# EAGLE board omnetics-adapter-64_panel (EAGLE 8.3.2), part 1 of 3
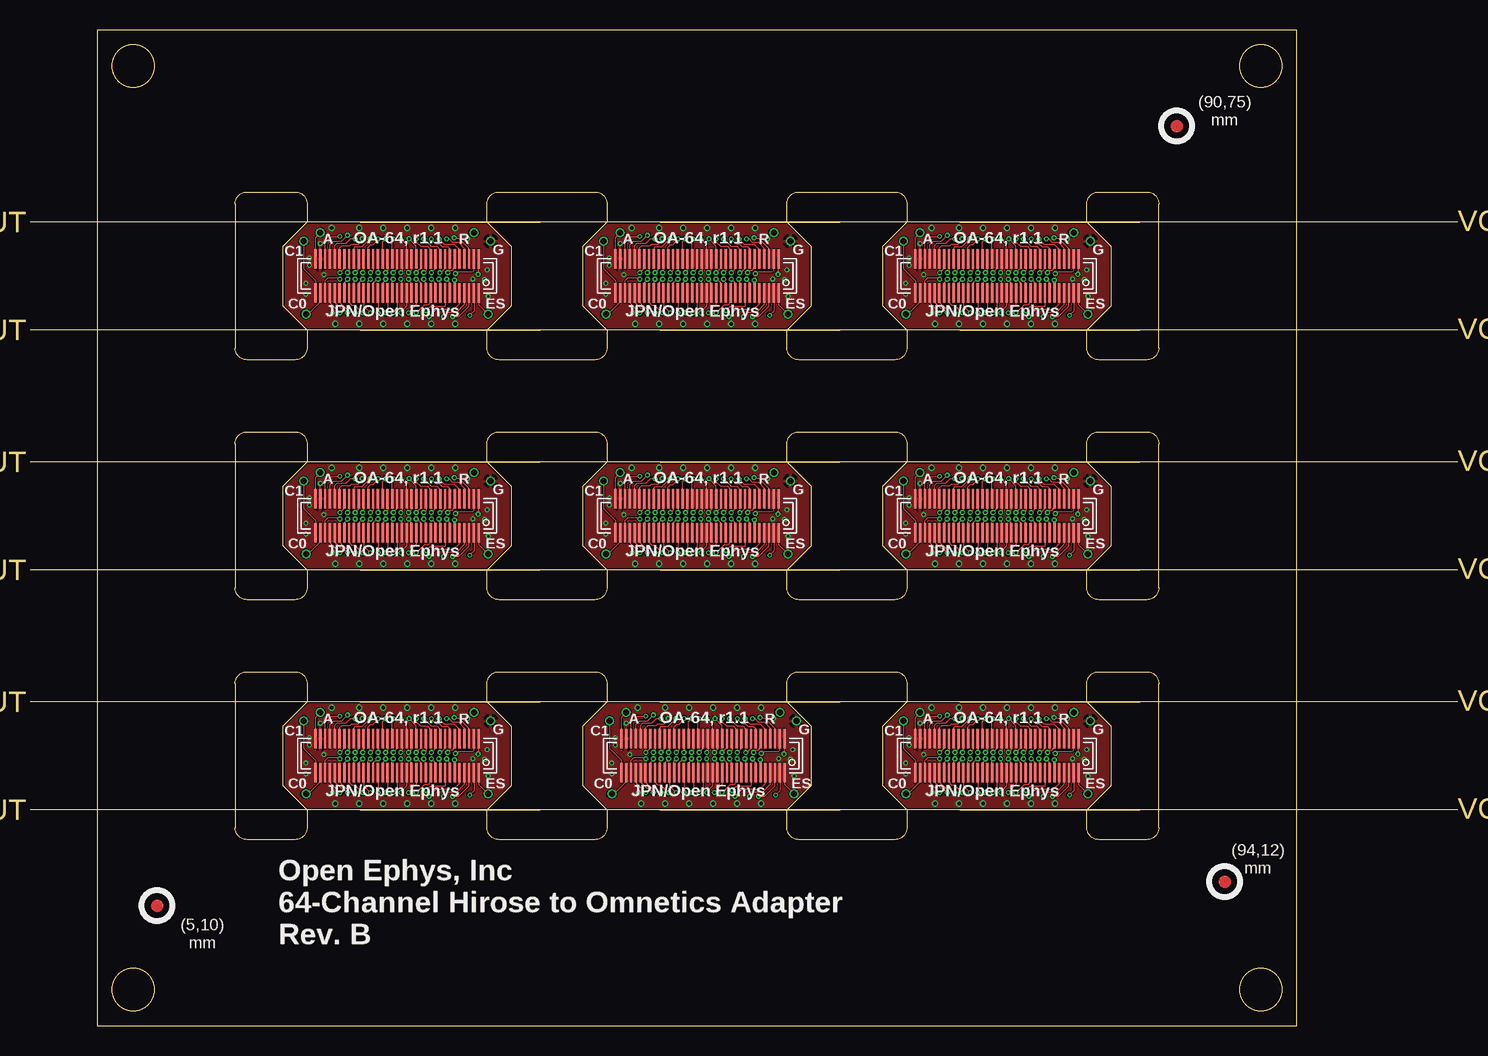
[diagram p0: board, top side]
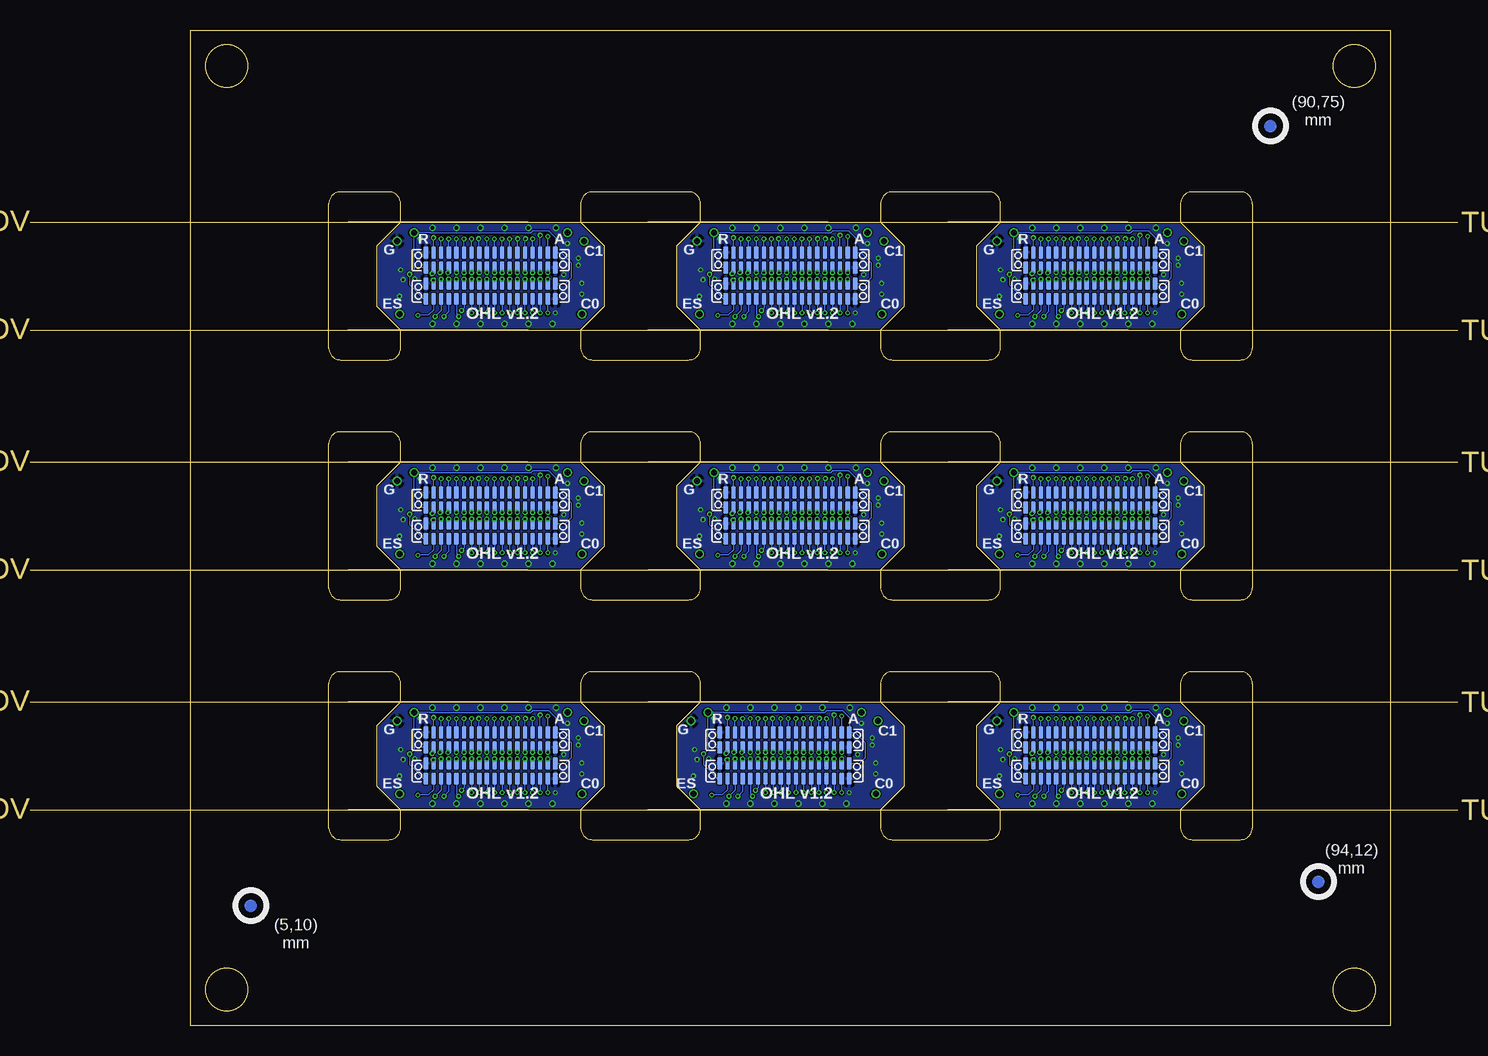
[diagram p1: board, bottom side, seen from below]

Size 119 x 83 mm. Coordinates in mm from the lower left corner, seen from the top.
Outline: 220 segments
Outline: circle at 8.6,80 radius 1.75
Outline: circle at 102.6,80 radius 1.75
Outline: circle at 102.6,3 radius 1.75
Outline: circle at 8.6,3 radius 1.75
Copper layers (1*16): Top 0.035mm / dielectric 0.2mm / Bottom 0.035mm
Design rules "jlcpcb-2-layer": minimum track width 3.5mil, minimum drill 0.2mm, track to track 3.5mil, track to pad 5mil, pad to pad 5mil, via to via 5mil, smd to smd 0mil, copper to edge 0.1mm, drill to drill 5mil, minimum pad ring 4mil, minimum via ring 4mil, stop-mask expansion 3mil, vias tented up to drill 100mil, thermal gap 10mil

## Footprints (pad centres in the part's own frame; a part is rotated, then mirrored left to right if it is on the bottom)
GOLDPIN_0.5ID_0.7OD = drill 0.5 pad 0.7: P$1 0,0
DDF40-70REC-LRG = smd 0.2 x 1.64: 1 -6.8,1.42; 2 -6.4,1.42; 3 -6,1.42; 4 -5.6,1.42; 5 -5.2,1.42; 6 -4.8,1.42; 7 -4.4,1.42; 8 -4,1.42; 9 -3.6,1.42; 10 -3.2,1.42; 11 -2.8,1.42; 12 -2.4,1.42; 13 -2,1.42; 14 -1.6,1.42; 15 -1.2,1.42; 16 -0.8,1.42; 17 -0.4,1.42; 18 0,1.42; 19 0.4,1.42; 20 0.8,1.42; 21 1.2,1.42; 22 1.6,1.42; 23 2,1.42; 24 2.4,1.42; 25 2.8,1.42; 26 3.2,1.42; 27 3.6,1.42; 28 4,1.42; 29 4.4,1.42; 30 4.8,1.42; 31 5.2,1.42; 32 5.6,1.42; 33 6,1.42; 34 6.4,1.42; 35 6.8,1.42; 36 6.8,-1.42; 37 6.4,-1.42; 38 6,-1.42; 39 5.6,-1.42; 40 5.2,-1.42; 41 4.8,-1.42; 42 4.4,-1.42; 43 4,-1.42; 44 3.6,-1.42; 45 3.2,-1.42; 46 2.8,-1.42; 47 2.4,-1.42; 48 2,-1.42; 49 1.6,-1.42; 50 1.2,-1.42; 51 0.8,-1.42; 52 0.4,-1.42; 53 0,-1.42; 54 -0.4,-1.42; 55 -0.8,-1.42; 56 -1.2,-1.42; 57 -1.6,-1.42; 58 -2,-1.42; 59 -2.4,-1.42; 60 -2.8,-1.42; 61 -3.2,-1.42; 62 -3.6,-1.42; 63 -4,-1.42; 64 -4.4,-1.42; 65 -4.8,-1.42; 66 -5.2,-1.42; 67 -5.6,-1.42; 68 -6,-1.42; 69 -6.4,-1.42; 70 -6.8,-1.42
NPD-36-VV-GS = smd 0.381 x 1.016: 1 0,0; 2 0.635,0; 3 1.27,0; 4 1.905,0; 5 2.54,0; 6 3.175,0; 7 3.81,0; 8 4.445,0; 9 5.08,0; 10 5.715,0; 11 6.35,0; 12 6.985,0; 13 7.62,0; 14 8.255,0; 15 8.89,0; 16 9.525,0; 17 10.16,0; 18 10.795,0; 19 10.795,1.27; 20 10.16,1.27; 21 9.525,1.27; 22 8.89,1.27; 23 8.255,1.27; 24 7.62,1.27; 25 6.985,1.27; 26 6.35,1.27; 27 5.715,1.27; 28 5.08,1.27; 29 4.445,1.27; 30 3.81,1.27; 31 3.175,1.27; 32 2.54,1.27; 33 1.905,1.27; 34 1.27,1.27; 35 0.635,1.27; 36 0,1.27

## Placement (x,y rotation side)
AN  LRG_GP  [GOLDPIN_0.5ID_0.7OD]  24.2,26.1 0 top
AN1  LRG_GP  [GOLDPIN_0.5ID_0.7OD]  49.7,26.1 0 top
AN2  LRG_GP  [GOLDPIN_0.5ID_0.7OD]  74.2,26.1 0 top
AN3  LRG_GP  [GOLDPIN_0.5ID_0.7OD]  24.2,46.1 0 top
AN4  LRG_GP  [GOLDPIN_0.5ID_0.7OD]  49.2,46.1 0 top
AN5  LRG_GP  [GOLDPIN_0.5ID_0.7OD]  74.2,46.1 0 top
AN6  LRG_GP  [GOLDPIN_0.5ID_0.7OD]  74.2,66.1 0 top
AN7  LRG_GP  [GOLDPIN_0.5ID_0.7OD]  49.2,66.1 0 top
AN8  LRG_GP  [GOLDPIN_0.5ID_0.7OD]  24.2,66.1 0 top
CAT0  LRG_GP  [GOLDPIN_0.5ID_0.7OD]  23,19.3 0 top
CAT1  LRG_GP  [GOLDPIN_0.5ID_0.7OD]  22.8,25.4 0 top
CAT2  LRG_GP  [GOLDPIN_0.5ID_0.7OD]  48.5,19.3 0 top
CAT3  LRG_GP  [GOLDPIN_0.5ID_0.7OD]  48.3,25.4 0 top
CAT4  LRG_GP  [GOLDPIN_0.5ID_0.7OD]  73,19.3 0 top
CAT5  LRG_GP  [GOLDPIN_0.5ID_0.7OD]  72.8,25.4 0 top
CAT6  LRG_GP  [GOLDPIN_0.5ID_0.7OD]  23,39.3 0 top
CAT7  LRG_GP  [GOLDPIN_0.5ID_0.7OD]  22.8,45.4 0 top
CAT8  LRG_GP  [GOLDPIN_0.5ID_0.7OD]  48,39.3 0 top
CAT9  LRG_GP  [GOLDPIN_0.5ID_0.7OD]  47.8,45.4 0 top
CAT10  LRG_GP  [GOLDPIN_0.5ID_0.7OD]  73,39.3 0 top
CAT11  LRG_GP  [GOLDPIN_0.5ID_0.7OD]  72.8,45.4 0 top
CAT12  LRG_GP  [GOLDPIN_0.5ID_0.7OD]  73,59.3 0 top
CAT13  LRG_GP  [GOLDPIN_0.5ID_0.7OD]  72.8,65.4 0 top
CAT14  LRG_GP  [GOLDPIN_0.5ID_0.7OD]  48,59.3 0 top
CAT15  LRG_GP  [GOLDPIN_0.5ID_0.7OD]  47.8,65.4 0 top
CAT16  LRG_GP  [GOLDPIN_0.5ID_0.7OD]  23,59.3 0 top
CAT17  LRG_GP  [GOLDPIN_0.5ID_0.7OD]  22.8,65.4 0 top
E$1  [FIDUCIAL]  10.6,10 0 top
E$2  [FIDUCIAL]  99.6,12 0 top
E$3  [FIDUCIAL]  95.6,75 0 top
E$4  [FIDUCIAL]  100.6,10 0 bottom
E$5  [FIDUCIAL]  11.6,12 0 bottom
E$6  [FIDUCIAL]  15.6,75 0 bottom
ESTIM  LRG_GP  [GOLDPIN_0.5ID_0.7OD]  38.2,19.3 0 top
ESTIM1  LRG_GP  [GOLDPIN_0.5ID_0.7OD]  37,26.1 0 top
ESTIM2  LRG_GP  [GOLDPIN_0.5ID_0.7OD]  38.4,25.4 0 top
ESTIM3  LRG_GP  [GOLDPIN_0.5ID_0.7OD]  63.7,19.3 0 top
ESTIM4  LRG_GP  [GOLDPIN_0.5ID_0.7OD]  62.5,26.1 0 top
ESTIM5  LRG_GP  [GOLDPIN_0.5ID_0.7OD]  63.9,25.4 0 top
ESTIM6  LRG_GP  [GOLDPIN_0.5ID_0.7OD]  88.2,19.3 0 top
ESTIM7  LRG_GP  [GOLDPIN_0.5ID_0.7OD]  87,26.1 0 top
ESTIM8  LRG_GP  [GOLDPIN_0.5ID_0.7OD]  88.4,25.4 0 top
ESTIM9  LRG_GP  [GOLDPIN_0.5ID_0.7OD]  38.2,39.3 0 top
ESTIM10  LRG_GP  [GOLDPIN_0.5ID_0.7OD]  37,46.1 0 top
ESTIM11  LRG_GP  [GOLDPIN_0.5ID_0.7OD]  38.4,45.4 0 top
ESTIM12  LRG_GP  [GOLDPIN_0.5ID_0.7OD]  63.2,39.3 0 top
ESTIM13  LRG_GP  [GOLDPIN_0.5ID_0.7OD]  62,46.1 0 top
ESTIM14  LRG_GP  [GOLDPIN_0.5ID_0.7OD]  63.4,45.4 0 top
ESTIM15  LRG_GP  [GOLDPIN_0.5ID_0.7OD]  88.2,39.3 0 top
ESTIM16  LRG_GP  [GOLDPIN_0.5ID_0.7OD]  87,46.1 0 top
ESTIM17  LRG_GP  [GOLDPIN_0.5ID_0.7OD]  88.4,45.4 0 top
ESTIM18  LRG_GP  [GOLDPIN_0.5ID_0.7OD]  88.2,59.3 0 top
ESTIM19  LRG_GP  [GOLDPIN_0.5ID_0.7OD]  87,66.1 0 top
ESTIM20  LRG_GP  [GOLDPIN_0.5ID_0.7OD]  88.4,65.4 0 top
ESTIM21  LRG_GP  [GOLDPIN_0.5ID_0.7OD]  63.2,59.3 0 top
ESTIM22  LRG_GP  [GOLDPIN_0.5ID_0.7OD]  62,66.1 0 top
ESTIM23  LRG_GP  [GOLDPIN_0.5ID_0.7OD]  63.4,65.4 0 top
ESTIM24  LRG_GP  [GOLDPIN_0.5ID_0.7OD]  38.2,59.3 0 top
ESTIM25  LRG_GP  [GOLDPIN_0.5ID_0.7OD]  37,66.1 0 top
ESTIM26  LRG_GP  [GOLDPIN_0.5ID_0.7OD]  38.4,65.4 0 top
J1  DF40-REC  [DDF40-70REC-LRG]  30.6,22.5 180 top
J2  [NPD-36-VV-GS]  25.2,24.45 180 bottom
J3  [NPD-36-VV-GS]  25.2,21.85 180 bottom
J4  DF40-REC  [DDF40-70REC-LRG]  56.1,22.5 180 top
J5  [NPD-36-VV-GS]  50.7,24.45 180 bottom
J6  [NPD-36-VV-GS]  50.7,21.85 180 bottom
J7  DF40-REC  [DDF40-70REC-LRG]  80.6,22.5 180 top
J8  [NPD-36-VV-GS]  75.2,24.45 180 bottom
J9  [NPD-36-VV-GS]  75.2,21.85 180 bottom
J10  DF40-REC  [DDF40-70REC-LRG]  30.6,42.5 180 top
J11  [NPD-36-VV-GS]  25.2,44.45 180 bottom
J12  [NPD-36-VV-GS]  25.2,41.85 180 bottom
J13  DF40-REC  [DDF40-70REC-LRG]  55.6,42.5 180 top
J14  [NPD-36-VV-GS]  50.2,44.45 180 bottom
J15  [NPD-36-VV-GS]  50.2,41.85 180 bottom
J16  DF40-REC  [DDF40-70REC-LRG]  80.6,42.5 180 top
J17  [NPD-36-VV-GS]  75.2,44.45 180 bottom
J18  [NPD-36-VV-GS]  75.2,41.85 180 bottom
J19  DF40-REC  [DDF40-70REC-LRG]  80.6,62.5 180 top
J20  [NPD-36-VV-GS]  75.2,64.45 180 bottom
J21  [NPD-36-VV-GS]  75.2,61.85 180 bottom
J22  DF40-REC  [DDF40-70REC-LRG]  55.6,62.5 180 top
J23  [NPD-36-VV-GS]  50.2,64.45 180 bottom
J24  [NPD-36-VV-GS]  50.2,61.85 180 bottom
J25  DF40-REC  [DDF40-70REC-LRG]  30.6,62.5 180 top
J26  [NPD-36-VV-GS]  25.2,64.45 180 bottom
J27  [NPD-36-VV-GS]  25.2,61.85 180 bottom

## Library data of the parts
AN AN1-AN8 CAT0 CAT1-CAT17 ESTIM ESTIM1-ESTIM26 J1-J27 = jonnew
E$1-E$6 = fiducial

## Nets
AN: AN.P$1 J1.36
AN1: AN1.P$1 J4.36
AN2: AN2.P$1 J7.36
AN3: AN3.P$1 J10.36
AN4: AN4.P$1 J13.36
AN5: AN5.P$1 J16.36
AN6: AN6.P$1 J19.36
AN7: AN7.P$1 J22.36
AN8: AN8.P$1 J25.36
CAT0: CAT0.P$1 J1.34
CAT1: CAT1.P$1 J1.35
CAT2: CAT2.P$1 J4.34
CAT3: CAT3.P$1 J4.35
CAT4: CAT4.P$1 J7.34
CAT5: CAT5.P$1 J7.35
CAT6: CAT6.P$1 J10.34
CAT7: CAT7.P$1 J10.35
CAT8: CAT8.P$1 J13.34
CAT9: CAT9.P$1 J13.35
CAT10: CAT10.P$1 J16.34
CAT11: CAT11.P$1 J16.35
CAT12: CAT12.P$1 J19.34
CAT13: CAT13.P$1 J19.35
CAT14: CAT14.P$1 J22.34
CAT15: CAT15.P$1 J22.35
CAT16: CAT16.P$1 J25.34
CAT17: CAT17.P$1 J25.35
ESTIM: ESTIM.P$1 J1.1
ESTIM1: ESTIM3.P$1 J4.1
ESTIM2: ESTIM6.P$1 J7.1
ESTIM3: ESTIM9.P$1 J10.1
ESTIM4: ESTIM12.P$1 J13.1
ESTIM5: ESTIM15.P$1 J16.1
ESTIM6: ESTIM18.P$1 J19.1
ESTIM7: ESTIM21.P$1 J22.1
ESTIM8: ESTIM24.P$1 J25.1
GND: ESTIM5.P$1 J4.37 J5.18 J5.36 J6.18 J6.36
GND1: ESTIM2.P$1 J1.37 J2.18 J2.36 J3.18 J3.36
GND2: ESTIM8.P$1 J7.37 J8.18 J8.36 J9.18 J9.36
GND3: ESTIM11.P$1 J10.37 J11.18 J11.36 J12.18 J12.36
GND4: ESTIM14.P$1 J13.37 J14.18 J14.36 J15.18 J15.36
GND5: ESTIM17.P$1 J16.37 J17.18 J17.36 J18.18 J18.36
GND6: ESTIM20.P$1 J19.37 J20.18 J20.36 J21.18 J21.36
GND7: ESTIM23.P$1 J22.37 J23.18 J23.36 J24.18 J24.36
GND8: ESTIM26.P$1 J25.37 J26.18 J26.36 J27.18 J27.36
N$1: J1.69 J2.20
N$2: J1.66 J2.15
N$3: J1.67 J2.16
N$4: J1.68 J2.17
N$5: J1.65 J2.21
N$6: J1.64 J2.14
N$7: J1.63 J2.22
N$8: J1.61 J2.23
N$9: J1.62 J2.13
N$10: J1.59 J2.24
N$11: J1.58 J2.25
N$12: J1.60 J2.12
N$13: J1.56 J2.26
N$14: J1.57 J2.11
N$15: J1.54 J2.27
N$16: J1.55 J2.10
N$17: J1.53 J2.28
N$18: J1.52 J2.9
N$19: J1.51 J2.29
N$20: J1.50 J2.8
N$21: J1.49 J2.30
N$22: J1.48 J2.31
N$23: J1.47 J2.7
N$24: J1.46 J2.32
N$25: J1.45 J2.33
N$26: J1.44 J2.6
N$27: J1.43 J2.34
N$28: J1.42 J2.35
N$29: J1.41 J2.5
N$30: J1.40 J2.4
N$31: J1.39 J2.3
N$32: J1.38 J2.2
N$33: J1.5 J3.23
N$34: J1.4 J3.22
N$35: J1.3 J3.21
N$36: J1.2 J3.20
N$37: J1.33 J3.2
N$38: J4.32 J6.35
N$39: J4.31 J6.34
N$40: J4.30 J6.33
N$41: J4.29 J6.3
N$42: J4.28 J6.32
N$43: J4.27 J6.4
N$44: J4.26 J6.5
N$45: J4.25 J6.31
N$46: J4.24 J6.6
N$47: J4.23 J6.7
N$48: J4.22 J6.30
N$49: J4.21 J6.8
N$50: J4.20 J6.29
N$51: J4.19 J6.9
N$52: J4.18 J6.28
N$53: J4.17 J6.10
N$54: J4.16 J6.27
N$55: J4.15 J6.11
N$56: J4.14 J6.26
N$57: J4.13 J6.12
N$58: J4.12 J6.13
N$59: J4.11 J6.25
N$60: J4.10 J6.14
N$61: J4.9 J6.15
N$62: J4.8 J6.24
N$63: J4.7 J6.16
N$64: J4.6 J6.17
N$65: J4.69 J5.20
N$66: J4.67 J5.16
N$67: J4.65 J5.21
N$68: J4.64 J5.14
N$69: J4.63 J5.22
N$70: J4.61 J5.23
N$71: J4.62 J5.13
N$72: J4.59 J5.24
N$73: J4.58 J5.25
N$74: J4.60 J5.12
N$75: J4.56 J5.26
N$76: J4.57 J5.11
N$77: J4.54 J5.27
N$78: J4.55 J5.10
N$79: J4.53 J5.28
N$80: J4.52 J5.9
N$81: J4.51 J5.29
N$82: J4.50 J5.8
N$83: J4.49 J5.30
N$84: J4.48 J5.31
N$85: J4.47 J5.7
N$86: J4.46 J5.32
N$87: J4.45 J5.33
N$88: J4.44 J5.6
N$89: J4.43 J5.34
N$90: J4.42 J5.35
N$91: J4.41 J5.5
N$92: J4.39 J5.3
N$93: J4.5 J6.23
N$94: J4.4 J6.22
N$95: J4.3 J6.21
N$96: J4.2 J6.20
N$97: J4.66 J5.15
N$98: J4.68 J5.17
N$99: J4.40 J5.4
N$100: J4.38 J5.2
N$101: J4.33 J6.2
N$102: J7.32 J9.35
N$103: J7.31 J9.34
N$104: J7.30 J9.33
N$105: J7.29 J9.3
N$106: J7.28 J9.32
N$107: J7.27 J9.4
N$108: J7.26 J9.5
N$109: J7.25 J9.31
N$110: J7.24 J9.6
N$111: J7.23 J9.7
N$112: J7.22 J9.30
N$113: J7.21 J9.8
N$114: J7.20 J9.29
N$115: J7.19 J9.9
N$116: J7.18 J9.28
N$117: J7.17 J9.10
N$118: J7.16 J9.27
N$119: J7.15 J9.11
N$120: J7.14 J9.26
N$121: J7.13 J9.12
N$122: J7.12 J9.13
N$123: J7.11 J9.25
N$124: J7.10 J9.14
N$125: J7.9 J9.15
N$126: J7.8 J9.24
N$127: J7.7 J9.16
N$128: J7.6 J9.17
N$129: J7.69 J8.20
N$130: J7.67 J8.16
N$131: J7.65 J8.21
N$132: J7.64 J8.14
N$133: J7.63 J8.22
N$134: J7.61 J8.23
N$135: J7.62 J8.13
N$136: J7.59 J8.24
N$137: J7.58 J8.25
N$138: J7.60 J8.12
N$139: J7.56 J8.26
N$140: J7.57 J8.11
N$141: J7.54 J8.27
N$142: J7.55 J8.10
N$143: J7.53 J8.28
N$144: J7.52 J8.9
N$145: J7.51 J8.29
N$146: J7.50 J8.8
N$147: J7.49 J8.30
N$148: J7.48 J8.31
N$149: J7.47 J8.7
N$150: J7.46 J8.32
N$151: J7.45 J8.33
N$152: J7.44 J8.6
N$153: J7.43 J8.34
N$154: J7.42 J8.35
N$155: J7.41 J8.5
N$156: J7.39 J8.3
N$157: J7.5 J9.23
N$158: J7.4 J9.22
N$159: J7.3 J9.21
N$160: J7.2 J9.20
N$161: J7.66 J8.15
N$162: J7.68 J8.17
N$163: J7.40 J8.4
N$164: J7.38 J8.2
N$165: J7.33 J9.2
N$166: J10.32 J12.35
N$167: J10.31 J12.34
N$168: J10.30 J12.33
N$169: J10.29 J12.3
N$170: J10.28 J12.32
N$171: J10.27 J12.4
N$172: J10.26 J12.5
N$173: J10.25 J12.31
N$174: J10.24 J12.6
N$175: J10.23 J12.7
N$176: J10.22 J12.30
N$177: J10.21 J12.8
N$178: J10.20 J12.29
N$179: J10.19 J12.9
N$180: J10.18 J12.28
N$181: J10.17 J12.10
N$182: J10.16 J12.27
N$183: J10.15 J12.11
N$184: J10.14 J12.26
N$185: J10.13 J12.12
N$186: J10.12 J12.13
N$187: J10.11 J12.25
N$188: J10.10 J12.14
N$189: J10.9 J12.15
N$190: J10.8 J12.24
N$191: J10.7 J12.16
N$192: J10.6 J12.17
N$193: J10.69 J11.20
N$194: J10.67 J11.16
N$195: J10.65 J11.21
N$196: J10.64 J11.14
N$197: J10.63 J11.22
N$198: J10.61 J11.23
N$199: J10.62 J11.13
N$200: J1.32 J3.35
N$201: J1.31 J3.34
N$202: J1.30 J3.33
N$203: J1.29 J3.3
N$204: J1.28 J3.32
N$205: J1.27 J3.4
N$206: J1.26 J3.5
N$207: J1.25 J3.31
N$208: J1.24 J3.6
N$209: J1.23 J3.7
N$210: J1.22 J3.30
N$211: J1.21 J3.8
N$212: J1.20 J3.29
N$213: J1.19 J3.9
N$214: J1.18 J3.28
N$215: J1.17 J3.10
N$216: J1.16 J3.27
N$217: J1.15 J3.11
N$218: J1.14 J3.26
N$219: J1.13 J3.12
N$220: J1.12 J3.13
N$221: J1.11 J3.25
N$222: J1.10 J3.14
N$223: J1.9 J3.15
N$224: J1.8 J3.24
N$225: J1.7 J3.16
N$226: J1.6 J3.17
N$227: J10.59 J11.24
N$228: J10.58 J11.25
N$229: J10.60 J11.12
N$230: J10.56 J11.26
N$231: J10.57 J11.11
N$232: J10.54 J11.27
N$233: J10.55 J11.10
N$234: J10.53 J11.28
N$235: J10.52 J11.9
N$236: J10.51 J11.29
N$237: J10.50 J11.8
N$238: J10.49 J11.30
N$239: J10.48 J11.31
N$240: J10.47 J11.7
N$241: J10.46 J11.32
N$242: J10.45 J11.33
N$243: J10.44 J11.6
N$244: J10.43 J11.34
N$245: J10.42 J11.35
N$246: J10.41 J11.5
N$247: J10.39 J11.3
N$248: J10.5 J12.23
N$249: J10.4 J12.22
N$250: J10.3 J12.21
N$251: J10.2 J12.20
N$252: J10.66 J11.15
N$253: J10.68 J11.17
N$254: J10.40 J11.4
N$255: J10.38 J11.2
N$256: J10.33 J12.2
N$257: J13.32 J15.35
N$258: J13.31 J15.34
N$259: J13.30 J15.33
N$260: J13.29 J15.3
N$261: J13.28 J15.32
N$262: J13.27 J15.4
N$263: J13.26 J15.5
N$264: J13.25 J15.31
N$265: J13.24 J15.6
N$266: J13.23 J15.7
N$267: J13.22 J15.30
N$268: J13.21 J15.8
N$269: J13.20 J15.29
N$270: J13.19 J15.9
N$271: J13.18 J15.28
N$272: J13.17 J15.10
N$273: J13.16 J15.27
N$274: J13.15 J15.11
N$275: J13.14 J15.26
N$276: J13.13 J15.12
N$277: J13.12 J15.13
N$278: J13.11 J15.25
N$279: J13.10 J15.14
N$280: J13.9 J15.15
N$281: J13.8 J15.24
N$282: J13.7 J15.16
N$283: J13.6 J15.17
N$284: J13.69 J14.20
N$285: J13.67 J14.16
N$286: J13.65 J14.21
N$287: J13.64 J14.14
N$288: J13.63 J14.22
N$289: J13.61 J14.23
N$290: J13.62 J14.13
N$291: J13.59 J14.24
N$292: J13.58 J14.25
N$293: J13.60 J14.12
N$294: J13.56 J14.26
N$295: J13.57 J14.11
N$296: J13.54 J14.27
N$297: J13.55 J14.10
N$298: J13.53 J14.28
N$299: J13.52 J14.9
N$300: J13.51 J14.29
N$301: J13.50 J14.8
N$302: J13.49 J14.30
N$303: J13.48 J14.31
N$304: J13.47 J14.7
N$305: J13.46 J14.32
N$306: J13.45 J14.33
N$307: J13.44 J14.6
N$308: J13.43 J14.34
N$309: J13.42 J14.35
N$310: J13.41 J14.5
N$311: J13.39 J14.3
N$312: J13.5 J15.23
N$313: J13.4 J15.22
N$314: J13.3 J15.21
N$315: J13.2 J15.20
N$316: J13.66 J14.15
N$317: J13.68 J14.17
N$318: J13.40 J14.4
N$319: J13.38 J14.2
N$320: J13.33 J15.2
N$321: J16.32 J18.35
N$322: J16.31 J18.34
N$323: J16.30 J18.33
N$324: J16.29 J18.3
N$325: J16.28 J18.32
N$326: J16.27 J18.4
N$327: J16.26 J18.5
N$328: J16.25 J18.31
N$329: J16.24 J18.6
N$330: J16.23 J18.7
N$331: J16.22 J18.30
N$332: J16.21 J18.8
N$333: J16.20 J18.29
N$334: J16.19 J18.9
N$335: J16.18 J18.28
N$336: J16.17 J18.10
N$337: J16.16 J18.27
N$338: J16.15 J18.11
N$339: J16.14 J18.26
N$340: J16.13 J18.12
N$341: J16.12 J18.13
N$342: J16.11 J18.25
N$343: J16.10 J18.14
N$344: J16.9 J18.15
N$345: J16.8 J18.24
N$346: J16.7 J18.16
N$347: J16.6 J18.17
N$348: J16.69 J17.20
N$349: J16.67 J17.16
N$350: J16.65 J17.21
N$351: J16.64 J17.14
N$352: J16.63 J17.22
N$353: J16.61 J17.23
N$354: J16.62 J17.13
N$355: J16.59 J17.24
N$356: J16.58 J17.25
N$357: J16.60 J17.12
N$358: J16.56 J17.26
N$359: J16.57 J17.11
N$360: J16.54 J17.27
N$361: J16.55 J17.10
N$362: J16.53 J17.28
N$363: J16.52 J17.9
N$364: J16.51 J17.29
N$365: J16.50 J17.8
N$366: J16.49 J17.30
N$367: J16.48 J17.31
N$368: J16.47 J17.7
N$369: J16.46 J17.32
N$370: J16.45 J17.33
N$371: J16.44 J17.6
N$372: J16.43 J17.34
N$373: J16.42 J17.35
N$374: J16.41 J17.5
N$375: J16.39 J17.3
N$376: J16.5 J18.23
N$377: J16.4 J18.22
N$378: J16.3 J18.21
N$379: J16.2 J18.20
N$380: J16.66 J17.15
N$381: J16.68 J17.17
N$382: J16.40 J17.4
N$383: J16.38 J17.2
N$384: J16.33 J18.2
N$385: J19.32 J21.35
N$386: J19.31 J21.34
N$387: J19.30 J21.33
N$388: J19.29 J21.3
N$389: J19.28 J21.32
N$390: J19.27 J21.4
N$391: J19.26 J21.5
N$392: J19.25 J21.31
N$393: J19.24 J21.6
N$394: J19.23 J21.7
N$395: J19.22 J21.30
N$396: J19.21 J21.8
N$397: J19.20 J21.29
N$398: J19.19 J21.9
N$399: J19.18 J21.28
N$400: J19.17 J21.10
N$401: J19.16 J21.27
N$402: J19.15 J21.11
N$403: J19.14 J21.26
N$404: J19.13 J21.12
N$405: J19.12 J21.13
N$406: J19.11 J21.25
N$407: J19.10 J21.14
N$408: J19.9 J21.15
N$409: J19.8 J21.24
N$410: J19.7 J21.16
N$411: J19.6 J21.17
N$412: J19.69 J20.20
N$413: J19.67 J20.16
N$414: J19.65 J20.21
N$415: J19.64 J20.14
N$416: J19.63 J20.22
N$417: J19.61 J20.23
N$418: J19.62 J20.13
N$419: J19.59 J20.24
N$420: J19.58 J20.25
N$421: J19.60 J20.12
N$422: J19.56 J20.26
N$423: J19.57 J20.11
N$424: J19.54 J20.27
N$425: J19.55 J20.10
N$426: J19.53 J20.28
N$427: J19.52 J20.9
N$428: J19.51 J20.29
N$429: J19.50 J20.8
N$430: J19.49 J20.30
N$431: J19.48 J20.31
N$432: J19.47 J20.7
N$433: J19.46 J20.32
N$434: J19.45 J20.33
N$435: J19.44 J20.6
N$436: J19.43 J20.34
N$437: J19.42 J20.35
N$438: J19.41 J20.5
N$439: J19.39 J20.3
N$440: J19.5 J21.23
N$441: J19.4 J21.22
N$442: J19.3 J21.21
N$443: J19.2 J21.20
N$444: J19.66 J20.15
N$445: J19.68 J20.17
N$446: J19.40 J20.4
N$447: J19.38 J20.2
N$448: J19.33 J21.2
N$449: J22.32 J24.35
N$450: J22.31 J24.34
N$451: J22.30 J24.33
N$452: J22.29 J24.3
N$453: J22.28 J24.32
N$454: J22.27 J24.4
N$455: J22.26 J24.5
N$456: J22.25 J24.31
N$457: J22.24 J24.6
N$458: J22.23 J24.7
N$459: J22.22 J24.30
N$460: J22.21 J24.8
N$461: J22.20 J24.29
N$462: J22.19 J24.9
N$463: J22.18 J24.28
N$464: J22.17 J24.10
N$465: J22.16 J24.27
N$466: J22.15 J24.11
N$467: J22.14 J24.26
N$468: J22.13 J24.12
N$469: J22.12 J24.13
N$470: J22.11 J24.25
N$471: J22.10 J24.14
N$472: J22.9 J24.15
N$473: J22.8 J24.24
N$474: J22.7 J24.16
N$475: J22.6 J24.17
N$476: J22.69 J23.20
N$477: J22.67 J23.16
N$478: J22.65 J23.21
N$479: J22.64 J23.14
N$480: J22.63 J23.22
N$481: J22.61 J23.23
N$482: J22.62 J23.13
N$483: J22.59 J23.24
N$484: J22.58 J23.25
N$485: J22.60 J23.12
N$486: J22.56 J23.26
N$487: J22.57 J23.11
N$488: J22.54 J23.27
N$489: J22.55 J23.10
N$490: J22.53 J23.28
N$491: J22.52 J23.9
N$492: J22.51 J23.29
N$493: J22.50 J23.8
N$494: J22.49 J23.30
N$495: J22.48 J23.31
N$496: J22.47 J23.7
N$497: J22.46 J23.32
N$498: J22.45 J23.33
N$499: J22.44 J23.6
N$500: J22.43 J23.34
N$501: J22.42 J23.35
N$502: J22.41 J23.5
N$503: J22.39 J23.3
N$504: J22.5 J24.23
N$505: J22.4 J24.22
N$506: J22.3 J24.21
N$507: J22.2 J24.20
N$508: J22.66 J23.15
N$509: J22.68 J23.17
N$510: J22.40 J23.4
N$511: J22.38 J23.2
N$512: J22.33 J24.2
N$513: J25.32 J27.35
N$514: J25.31 J27.34
N$515: J25.30 J27.33
N$516: J25.29 J27.3
N$517: J25.28 J27.32
N$518: J25.27 J27.4
N$519: J25.26 J27.5
N$520: J25.25 J27.31
N$521: J25.24 J27.6
N$522: J25.23 J27.7
N$523: J25.22 J27.30
N$524: J25.21 J27.8
N$525: J25.20 J27.29
N$526: J25.19 J27.9
N$527: J25.18 J27.28
N$528: J25.17 J27.10
N$529: J25.16 J27.27
N$530: J25.15 J27.11
N$531: J25.14 J27.26
N$532: J25.13 J27.12
N$533: J25.12 J27.13
N$534: J25.11 J27.25
N$535: J25.10 J27.14
N$536: J25.9 J27.15
N$537: J25.8 J27.24
N$538: J25.7 J27.16
N$539: J25.6 J27.17
N$540: J25.69 J26.20
N$541: J25.67 J26.16
N$542: J25.65 J26.21
N$543: J25.64 J26.14
N$544: J25.63 J26.22
N$545: J25.61 J26.23
N$546: J25.62 J26.13
N$547: J25.59 J26.24
N$548: J25.58 J26.25
N$549: J25.60 J26.12
N$550: J25.56 J26.26
N$551: J25.57 J26.11
N$552: J25.54 J26.27
N$553: J25.55 J26.10
N$554: J25.53 J26.28
N$555: J25.52 J26.9
N$556: J25.51 J26.29
N$557: J25.50 J26.8
N$558: J25.49 J26.30
N$559: J25.48 J26.31
N$560: J25.47 J26.7
N$561: J25.46 J26.32
N$562: J25.45 J26.33
N$563: J25.44 J26.6
N$564: J25.43 J26.34
N$565: J25.42 J26.35
N$566: J25.41 J26.5
N$567: J25.39 J26.3
N$568: J25.5 J27.23
N$569: J25.4 J27.22
N$570: J25.3 J27.21
N$571: J25.2 J27.20
N$572: J25.66 J26.15
N$573: J25.68 J26.17
N$574: J25.40 J26.4
N$575: J25.38 J26.2
N$576: J25.33 J27.2
REF: ESTIM1.P$1 J1.70 J2.1 J2.19 J3.1 J3.19
REF1: ESTIM4.P$1 J4.70 J5.1 J5.19 J6.1 J6.19
REF2: ESTIM7.P$1 J7.70 J8.1 J8.19 J9.1 J9.19
REF3: ESTIM10.P$1 J10.70 J11.1 J11.19 J12.1 J12.19
REF4: ESTIM13.P$1 J13.70 J14.1 J14.19 J15.1 J15.19
REF5: ESTIM16.P$1 J16.70 J17.1 J17.19 J18.1 J18.19
REF6: ESTIM19.P$1 J19.70 J20.1 J20.19 J21.1 J21.19
REF7: ESTIM22.P$1 J22.70 J23.1 J23.19 J24.1 J24.19
REF8: ESTIM25.P$1 J25.70 J26.1 J26.19 J27.1 J27.19

## Tracks (layer width: path | path; a pad name or v marks a point on that pad's centre or on a via)
AN
  Top 0.1: J1.36 23.8,25.7 AN.P$1
AN1
  Top 0.1: J4.36 49.3,25.7 AN1.P$1
AN2
  Top 0.1: J7.36 73.8,25.7 AN2.P$1
AN3
  Top 0.1: J10.36 23.8,45.7 AN3.P$1
AN4
  Top 0.1: J13.36 48.8,45.7 AN4.P$1
AN5
  Top 0.1: J16.36 73.8,45.7 AN5.P$1
AN6
  Top 0.1: J19.36 73.8,65.7 AN6.P$1
AN7
  Top 0.1: J22.36 48.8,65.7 AN7.P$1
AN8
  Top 0.1: J25.36 23.8,65.7 AN8.P$1
CAT0
  Top 0.1: J1.34 24.2,20.31 23.19,19.3 CAT0.P$1
CAT1
  Top 0.1: J1.35 23.8,22.1 22.8,23.1 CAT1.P$1
CAT2
  Top 0.1: J4.34 49.7,20.31 48.69,19.3 CAT2.P$1
CAT3
  Top 0.1: J4.35 49.3,22.1 48.3,23.1 CAT3.P$1
CAT4
  Top 0.1: J7.34 74.2,20.31 73.19,19.3 CAT4.P$1
CAT5
  Top 0.1: J7.35 73.8,22.1 72.8,23.1 CAT5.P$1
CAT6
  Top 0.1: J10.34 24.2,40.31 23.19,39.3 CAT6.P$1
CAT7
  Top 0.1: J10.35 23.8,42.1 22.8,43.1 CAT7.P$1
CAT8
  Top 0.1: J13.34 49.2,40.31 48.19,39.3 CAT8.P$1
CAT9
  Top 0.1: J13.35 48.8,42.1 47.8,43.1 CAT9.P$1
CAT10
  Top 0.1: J16.34 74.2,40.31 73.19,39.3 CAT10.P$1
CAT11
  Top 0.1: J16.35 73.8,42.1 72.8,43.1 CAT11.P$1
CAT12
  Top 0.1: J19.34 74.2,60.31 73.19,59.3 CAT12.P$1
CAT13
  Top 0.1: J19.35 73.8,62.1 72.8,63.1 CAT13.P$1
CAT14
  Top 0.1: J22.34 49.2,60.31 48.19,59.3 CAT14.P$1
CAT15
  Top 0.1: J22.35 48.8,62.1 47.8,63.1 CAT15.P$1
CAT16
  Top 0.1: J25.34 24.2,60.31 23.19,59.3 CAT16.P$1
CAT17
  Top 0.1: J25.35 23.8,62.1 22.8,63.1 CAT17.P$1
ESTIM
  Top 0.1: J1.1 37.4,20.1 ESTIM.P$1
ESTIM1
  Top 0.1: J4.1 62.9,20.1 ESTIM3.P$1
ESTIM2
  Top 0.1: J7.1 87.4,20.1 ESTIM6.P$1
ESTIM3
  Top 0.1: J10.1 37.4,40.1 ESTIM9.P$1
ESTIM4
  Top 0.1: J13.1 62.4,40.1 ESTIM12.P$1
ESTIM5
  Top 0.1: J16.1 87.4,40.1 ESTIM15.P$1
ESTIM6
  Top 0.1: J19.1 87.4,60.1 ESTIM18.P$1
ESTIM7
  Top 0.1: J22.1 62.4,60.1 ESTIM21.P$1
ESTIM8
  Top 0.1: J25.1 37.4,60.1 ESTIM24.P$1
GND  (via drill 0.2, 0.3)
  other vias: 50.7,19.41 63.4,22.18 48.5,20.98 48.5,21.88 48.8,23.98 63.7,20.8 63.6,23 62.42,22.24 61.98,25.6 48.8,23.38 50,22.6 50.65,26.5 52.95,26.5 54.95,26.5 56.95,26.5 58.95,26.5 60.95,26.5 50.95,18.5 52.95,18.5 54.95,18.5 56.95,18.5 58.95,18.5 60.95,18.5 49.7,25.2
  pour Bottom: 45.55,33.85 66.55,33.85 66.55,10.85 45.55,10.85
  pour Top: 42.55,36.85 69.55,36.85 69.55,7.85 42.55,7.85
GND1  (via drill 0.2, 0.3)
  other vias: 25.2,19.41 37.9,22.18 23,20.98 23,21.88 23.3,23.98 38.2,20.8 38.1,23 36.92,22.24 36.48,25.6 23.3,23.38 24.5,22.6 25.15,26.5 27.45,26.5 29.45,26.5 31.45,26.5 33.45,26.5 35.45,26.5 25.45,18.5 27.45,18.5 29.45,18.5 31.45,18.5 33.45,18.5 35.45,18.5 24.2,25.2
  pour Bottom: 20.05,33.85 41.05,33.85 41.05,10.85 20.05,10.85
  pour Top: 17.05,36.85 44.05,36.85 44.05,7.85 17.05,7.85
GND2  (via drill 0.2, 0.3)
  other vias: 75.2,19.41 87.9,22.18 73,20.98 73,21.88 73.3,23.98 88.2,20.8 88.1,23 86.92,22.24 86.48,25.6 73.3,23.38 74.5,22.6 75.15,26.5 77.45,26.5 79.45,26.5 81.45,26.5 83.45,26.5 85.45,26.5 75.45,18.5 77.45,18.5 79.45,18.5 81.45,18.5 83.45,18.5 85.45,18.5 74.2,25.2
  pour Bottom: 70.05,33.85 91.05,33.85 91.05,10.85 70.05,10.85
  pour Top: 67.05,36.85 94.05,36.85 94.05,7.85 67.05,7.85
GND3  (via drill 0.2, 0.3)
  other vias: 25.2,39.41 37.9,42.18 23,40.98 23,41.88 23.3,43.98 38.2,40.8 38.1,43 36.92,42.24 36.48,45.6 23.3,43.38 24.5,42.6 25.15,46.5 27.45,46.5 29.45,46.5 31.45,46.5 33.45,46.5 35.45,46.5 25.45,38.5 27.45,38.5 29.45,38.5 31.45,38.5 33.45,38.5 35.45,38.5 24.2,45.2
  pour Bottom: 20.05,53.85 41.05,53.85 41.05,30.85 20.05,30.85
  pour Top: 17.05,56.85 44.05,56.85 44.05,27.85 17.05,27.85
GND4  (via drill 0.2, 0.3)
  other vias: 50.2,39.41 62.9,42.18 48,40.98 48,41.88 48.3,43.98 63.2,40.8 63.1,43 61.92,42.24 61.48,45.6 48.3,43.38 49.5,42.6 50.15,46.5 52.45,46.5 54.45,46.5 56.45,46.5 58.45,46.5 60.45,46.5 50.45,38.5 52.45,38.5 54.45,38.5 56.45,38.5 58.45,38.5 60.45,38.5 49.2,45.2
  pour Bottom: 45.05,53.85 66.05,53.85 66.05,30.85 45.05,30.85
  pour Top: 42.05,56.85 69.05,56.85 69.05,27.85 42.05,27.85
GND5  (via drill 0.2, 0.3)
  other vias: 75.2,39.41 87.9,42.18 73,40.98 73,41.88 73.3,43.98 88.2,40.8 88.1,43 86.92,42.24 86.48,45.6 73.3,43.38 74.5,42.6 75.15,46.5 77.45,46.5 79.45,46.5 81.45,46.5 83.45,46.5 85.45,46.5 75.45,38.5 77.45,38.5 79.45,38.5 81.45,38.5 83.45,38.5 85.45,38.5 74.2,45.2
  pour Bottom: 70.05,53.85 91.05,53.85 91.05,30.85 70.05,30.85
  pour Top: 67.05,56.85 94.05,56.85 94.05,27.85 67.05,27.85
GND6  (via drill 0.2, 0.3)
  other vias: 75.2,59.41 87.9,62.18 73,60.98 73,61.88 73.3,63.98 88.2,60.8 88.1,63 86.92,62.24 86.48,65.6 73.3,63.38 74.5,62.6 75.15,66.5 77.45,66.5 79.45,66.5 81.45,66.5 83.45,66.5 85.45,66.5 75.45,58.5 77.45,58.5 79.45,58.5 81.45,58.5 83.45,58.5 85.45,58.5 74.2,65.2
  pour Bottom: 70.05,73.85 91.05,73.85 91.05,50.85 70.05,50.85
  pour Top: 67.05,76.85 94.05,76.85 94.05,47.85 67.05,47.85
GND7  (via drill 0.2, 0.3)
  other vias: 50.2,59.41 62.9,62.18 48,60.98 48,61.88 48.3,63.98 63.2,60.8 63.1,63 61.92,62.24 61.48,65.6 48.3,63.38 49.5,62.6 50.15,66.5 52.45,66.5 54.45,66.5 56.45,66.5 58.45,66.5 60.45,66.5 50.45,58.5 52.45,58.5 54.45,58.5 56.45,58.5 58.45,58.5 60.45,58.5 49.2,65.2
  pour Bottom: 45.05,73.85 66.05,73.85 66.05,50.85 45.05,50.85
  pour Top: 42.05,76.85 69.05,76.85 69.05,47.85 42.05,47.85
GND8  (via drill 0.2, 0.3)
  other vias: 25.2,59.41 37.9,62.18 23,60.98 23,61.88 23.3,63.98 38.2,60.8 38.1,63 36.92,62.24 36.48,65.6 23.3,63.38 24.5,62.6 25.15,66.5 27.45,66.5 29.45,66.5 31.45,66.5 33.45,66.5 35.45,66.5 25.45,58.5 27.45,58.5 29.45,58.5 31.45,58.5 33.45,58.5 35.45,58.5 24.2,65.2
  pour Bottom: 20.05,73.85 41.05,73.85 41.05,50.85 20.05,50.85
  pour Top: 17.05,76.85 44.05,76.85 44.05,47.85 17.05,47.85
N$1  (via drill 0.2)
  Top 0.1: J1.69 37,22.95 36.88,22.84 35.62,22.84 v35.47,22.68
  Bottom 0.1: J2.20 35.47,23.07 v35.47,22.68
N$2  (via drill 0.2)
  Top 0.1: 34.09,25.61 v34.09,25.59 34.57,25.11 35.38,25.11 35.8,24.69 J1.66
  Bottom 0.1: J2.15 v34.09,25.59
N$3  (via drill 0.2)
  Top 0.1: 34.73,25.57 v34.73,25.59 34.92,25.59 35.21,25.3 35.71,25.3 36.18,24.83 36.18,23.94 J1.67
  Bottom 0.1: J2.16 v34.73,25.59
N$4  (via drill 0.2)
  Top 0.1: 35.36,25.64 v35.36,25.68 35.44,25.6 35.77,25.6 36.6,24.77 J1.68
  Bottom 0.1: v35.36,25.68 J2.17
N$5  (via drill 0.2)
  Top 0.1: v34.82,22.77 34.97,22.92 35.17,22.92 35.28,23.03 35.28,23.09 35.4,23.21 J1.65
  Bottom 0.1: J2.21 34.73,22.77 v34.82,22.77
N$6  (via drill 0.2)
  Top 0.1: v33.46,25.59 33.46,25.54 33.8,25.2 34.09,25.2 34.37,24.92 34.81,24.92 35,24.73 J1.64
  Bottom 0.1: J2.14 v33.45,25.59 v33.46,25.59
N$7  (via drill 0.2)
  Top 0.1: J1.63 34.6,23.09 34.26,22.76 v34.17,22.76
  Bottom 0.1: J2.22 34.09,22.74 34.11,22.76 v34.17,22.76
N$8  (via drill 0.2)
  Top 0.1: 33.72,23.03 v33.46,22.77 | 33.72,23.03 33.8,23.11 | J1.61 33.8,23.11 | 33.8,23.11 33.72,23.03
  Bottom 0.1: v33.46,22.77 J2.23
N$9  (via drill 0.2)
  Top 0.1: 32.82,25.48 v32.82,25.59 33.49,24.92 33.97,24.92 34.2,24.69 J1.62
  Bottom 0.1: J2.13 v32.82,25.59
N$10  (via drill 0.2)
  Top 0.1: v32.82,22.77 33,22.95 J1.59
  Bottom 0.1: J2.24 v32.82,22.77
N$11  (via drill 0.2)
  Top 0.1: 32.34,22.92 32.37,22.92 | 32.21,22.79 v32.19,22.77 | 32.21,22.79 32.34,22.92 | 32.6,23.15 32.37,22.92 | 32.37,22.92 32.34,22.92 | 32.34,22.92 32.21,22.79 | J1.58 32.6,23.15 | 32.6,23.15 32.37,22.92
  Bottom 0.1: J2.25 v32.19,22.77
N$12  (via drill 0.2)
  Top 0.1: J1.60 33.4,24.69 33.17,24.92 32.6,24.92 32.19,25.33 v32.19,25.59
  Bottom 0.1: J2.12 v32.19,25.59
N$13  (via drill 0.2)
  Top 0.1: J1.56 31.8,23.02 v31.55,22.77
  Bottom 0.1: J2.26 v31.55,22.77
N$14  (via drill 0.2)
  Top 0.1: J1.57 32.2,25 v31.6,25.6
  Bottom 0.1: v31.6,25.6 31.6,24.5 J2.11
N$15  (via drill 0.2)
  Top 0.1: J1.54 31,22.85 v30.92,22.77
  Bottom 0.1: J2.27 v30.91,22.77 v30.92,22.77
N$16  (via drill 0.2)
  Top 0.1: 31.4,23.15 J1.55 31.4,25.11 v30.92,25.59
  Bottom 0.1: J2.10 v30.91,25.59 v30.92,25.59
N$17  (via drill 0.2)
  Top 0.1: J1.53 30.6,23.09 v30.28,22.77
  Bottom 0.1: J2.28 v30.28,22.77
N$18  (via drill 0.2)
  Top 0.1: J1.52 30.2,25.5 v30.29,25.59
  Bottom 0.1: J2.9 v30.28,25.58 v30.29,25.59
N$19  (via drill 0.2)
  Top 0.1: J1.51 29.8,22.92 v29.65,22.77
  Bottom 0.1: J2.29 v29.65,22.77
N$20  (via drill 0.2)
  Top 0.1: 29.63,25.57 29.4,25.34 | 29.63,25.57 v29.65,25.59 | J1.50 29.4,25.34 | 29.4,25.34 29.63,25.57
  Bottom 0.1: J2.8 v29.65,25.58 v29.65,25.59
N$21  (via drill 0.2)
  Top 0.1: J1.49 v29,22.78 v29.01,22.77
  Bottom 0.1: J2.30 v29.01,22.77
N$22  (via drill 0.2)
  Top 0.1: J1.48 28.6,22.99 v28.38,22.77
  Bottom 0.1: J2.31 v28.38,22.77
N$23  (via drill 0.2)
  Top 0.1: v29.02,25.59 29.02,25.52 28.6,25.1 28.4,25.1 28.2,24.9 J1.47
  Bottom 0.1: J2.7 v29.01,25.58 v29.02,25.59
N$24  (via drill 0.2)
  Top 0.1: J1.46 27.8,22.82 v27.74,22.77
  Bottom 0.1: J2.32 v27.74,22.77
N$25  (via drill 0.2)
  Top 0.1: J1.45 27.4,23.06 v27.11,22.77
  Bottom 0.1: J2.33 v27.1,22.77 v27.11,22.77
N$26  (via drill 0.2)
  Top 0.1: v28.35,25.6 27.67,24.92 27.1,24.92 27,24.82 J1.44
  Bottom 0.1: J2.6 28.38,25.57 v28.35,25.6
N$27  (via drill 0.2)
  Top 0.1: J1.43 26.6,22.89 v26.47,22.77
  Bottom 0.1: J2.34 v26.47,22.77
N$28  (via drill 0.2)
  Top 0.1: v25.84,22.77 25.87,22.77 26.2,23.1 J1.42
  Bottom 0.1: J2.35 v25.84,22.77
N$29  (via drill 0.2)
  Top 0.1: v27.7,25.6 27.7,25.5 27.35,25.15 26.8,25.15 26.68,25.03 26,25.03 25.8,24.83 J1.41
  Bottom 0.1: J2.5 27.74,25.56 v27.7,25.6
N$30  (via drill 0.2)
  Top 0.1: v27.1,25.59 v27.1,25.6 26.71,25.6 26.34,25.22 25.6,25.22 25.4,25.02 J1.40
  Bottom 0.1: J2.4 v27.1,25.59
N$31  (via drill 0.2)
  Top 0.1: v26.47,25.89 26.22,25.64 26.22,25.63 25.99,25.41 25.3,25.41 25,25.11 J1.39
  Bottom 0.1: J2.3 v26.47,25.89
N$32  (via drill 0.2)
  Top 0.1: v25.84,25.79 25.1,25.79 24.6,25.29 J1.38
  Bottom 0.1: v25.84,25.79 J2.2
N$33  (via drill 0.2)
  Top 0.1: J1.5 35.8,20.2 35.28,19.68 34.79,19.68 33.8,19.68 33.8,19.65 v33.26,19.11
  Bottom 0.1: J3.23 33.45,19.31 v33.26,19.11
N$34  (via drill 0.2)
  Top 0.1: J1.4 36.2,20.1 35.59,19.49 34.87,19.49 v34.49,19.11
  Bottom 0.1: J3.22 34.09,19.51 v34.49,19.11
N$35  (via drill 0.2)
  Top 0.1: J1.3 36.6,20 35.71,19.11 v35.23,19.11
  Bottom 0.1: 34.73,20.07 J3.21 34.73,19.61 v35.23,19.11
N$36  (via drill 0.2)
  Top 0.1: J1.2 37,19.55 v36.66,19.21
  Bottom 0.1: v36.66,19.21 35.8,19.21 35.36,19.65 J3.20
N$37  (via drill 0.2)
  Top 0.1: J1.33 24.6,22.1 24.8,22.3 25.8,22.3
  Top 0.152: v25.84,22.23 25.84,22.26 25.8,22.3
  Bottom 0.1: J3.2 v25.84,22.23
N$38  (via drill 0.2)
  Top 0.1: J4.32 50.5,20.25 v51.34,19.41
  Bottom 0.1: v51.34,19.41 J6.35
N$39  (via drill 0.2)
  Top 0.1: J4.31 50.9,20.31 51.42,19.79 51.49,19.79 51.54,19.74 51.64,19.74 v51.97,19.41
  Bottom 0.1: J6.34 v51.97,19.41
N$40  (via drill 0.2)
  Top 0.1: 51.3,20.72 J4.30 51.3,20.31 51.53,20.08 51.57,20.08 51.86,19.79 52.13,19.79 52.51,19.41 v52.61,19.41
  Bottom 0.1: J6.33 v52.61,19.41
N$41  (via drill 0.2)
  Top 0.1: J4.29 51.7,21.9 51.97,22.17 v51.97,22.23
  Bottom 0.1: J6.3 v51.97,22.23
N$42  (via drill 0.2)
  Top 0.1: J4.28 52.1,20.31 52.33,20.08 52.57,20.08 v53.24,19.41
  Bottom 0.1: J6.32 v53.24,19.41
N$43  (via drill 0.2)
  Top 0.1: v52.61,22.23 52.5,22.12 J4.27
  Bottom 0.1: J6.4 v52.61,22.23
N$44  (via drill 0.2)
  Top 0.1: J4.26 52.9,21.9 v53.23,22.23 v53.24,22.23
  Bottom 0.1: J6.5 v53.24,22.23
N$45  (via drill 0.2)
  Top 0.1: v53.88,19.41 53.3,19.99 J4.25
  Bottom 0.1: v53.88,19.41 53.85,19.44 53.88,19.46 J6.31
N$46  (via drill 0.2)
  Top 0.1: v53.88,22.23 53.7,22.05 J4.24
  Bottom 0.1: J6.6 v53.88,22.23
N$47  (via drill 0.2)
  Top 0.1: J4.23 54.1,21.9 54.43,22.23 v54.51,22.23
  Bottom 0.1: J6.7 v54.51,22.23
N$48  (via drill 0.2)
  Top 0.1: v54.51,19.41 54.5,19.42 J4.22
  Bottom 0.1: J6.30 54.51,19.7 | 54.51,19.7 54.5,19.69 | 54.51,19.7 v54.51,19.41
N$49  (via drill 0.2)
  Top 0.1: J4.21 54.9,21.9 55.15,22.15 v55.15,22.23
  Bottom 0.1: J6.8 v55.15,22.23
N$50  (via drill 0.2)
  Top 0.1: v55.15,19.41 55.3,19.56 J4.20
  Bottom 0.1: J6.29 v55.15,19.41
N$51  (via drill 0.2)
  Top 0.1: v55.78,22.23 55.7,22.15 J4.19
  Bottom 0.1: J6.9 v55.78,22.23
N$52  (via drill 0.2)
  Top 0.1: J4.18 56.1,19.8 55.78,19.48 v55.78,19.41
  Bottom 0.1: J6.28 v55.78,19.41
N$53  (via drill 0.2)
  Top 0.1: v56.42,22.23 56.5,22.15 J4.17
  Bottom 0.1: J6.10 v56.41,22.23 v56.42,22.23
N$54  (via drill 0.2)
  Top 0.1: v56.42,19.41 56.42,19.5 56.9,19.98 J4.16
  Bottom 0.1: J6.27 56.41,19.7 56.42,19.7 v56.42,19.41
N$55  (via drill 0.2)
  Top 0.1: J4.15 57.3,21.9 57.05,22.15 v57.05,22.23
  Bottom 0.1: J6.11 v57.05,22.23
N$56  (via drill 0.2)
  Top 0.1: v57.05,19.41 57.05,19.45 57.7,20.1 J4.14
  Bottom 0.1: J6.26 v57.05,19.41
N$57  (via drill 0.2)
  Top 0.1: J4.13 58.1,21.9 57.77,22.23 v57.69,22.23
  Bottom 0.1: J6.12 v57.69,22.23
N$58  (via drill 0.2)
  Top 0.1: J4.12 58.5,21.9 58.32,22.08 v58.32,22.23
  Bottom 0.1: J6.13 v58.32,22.23
N$59  (via drill 0.2)
  Top 0.1: J4.11 58.9,20.31 58.67,20.08 58.36,20.08 v57.69,19.41
  Bottom 0.1: J6.25 v57.69,19.41
N$60  (via drill 0.2)
  Top 0.1: J4.10 59.3,21.9 v58.97,22.23 v58.96,22.23
  Bottom 0.1: J6.14 v58.95,22.23 v58.96,22.23
N$61  (via drill 0.2)
  Top 0.1: J4.9 59.7,22 59.6,22.1 v59.6,22.23 v59.59,22.23
  Bottom 0.1: J6.15 v59.59,22.23
N$62  (via drill 0.2)
  Top 0.1: J4.8 60.1,20 59.1,20 59,19.9 58.81,19.9 v58.52,19.61
  Bottom 0.1: J6.24 58.32,19.81 v58.52,19.61
N$63  (via drill 0.2)
  Top 0.1: J4.7 60.5,21.9 60.23,22.17 v60.23,22.23
  Bottom 0.1: J6.16 v60.23,22.23
N$64  (via drill 0.2)
  Top 0.1: J4.6 60.9,22.04 60.88,22.06 v60.88,22.14
  Bottom 0.1: v60.88,22.14 60.88,21.87 J6.17
N$65  (via drill 0.2)
  Top 0.1: J4.69 62.5,22.95 62.38,22.84 61.12,22.84 v60.97,22.68
  Bottom 0.1: J5.20 60.97,23.07 v60.97,22.68
N$66  (via drill 0.2)
  Top 0.1: 60.23,25.57 v60.23,25.59 60.42,25.59 60.71,25.3 61.21,25.3 61.68,24.83 61.68,23.94 J4.67
  Bottom 0.1: J5.16 v60.23,25.59
N$67  (via drill 0.2)
  Top 0.1: v60.32,22.77 60.47,22.92 60.67,22.92 60.78,23.03 60.78,23.09 60.9,23.21 J4.65
  Bottom 0.1: J5.21 60.23,22.77 v60.32,22.77
N$68  (via drill 0.2)
  Top 0.1: v58.96,25.59 58.96,25.54 59.3,25.2 59.59,25.2 59.87,24.92 60.31,24.92 60.5,24.73 J4.64
  Bottom 0.1: J5.14 v58.95,25.59 v58.96,25.59
N$69  (via drill 0.2)
  Top 0.1: J4.63 60.1,23.09 59.76,22.76 v59.67,22.76
  Bottom 0.1: J5.22 59.59,22.74 59.61,22.76 v59.67,22.76
N$70  (via drill 0.2)
  Top 0.1: 59.22,23.03 v58.96,22.77 | 59.22,23.03 59.3,23.11 | J4.61 59.3,23.11 | 59.3,23.11 59.22,23.03
  Bottom 0.1: v58.96,22.77 J5.23
N$71  (via drill 0.2)
  Top 0.1: 58.32,25.48 v58.32,25.59 59,24.92 59.47,24.92 59.7,24.69 J4.62
  Bottom 0.1: J5.13 v58.32,25.59
N$72  (via drill 0.2)
  Top 0.1: v58.32,22.77 58.5,22.95 J4.59
  Bottom 0.1: J5.24 v58.32,22.77
N$73  (via drill 0.2)
  Top 0.1: 57.84,22.92 57.87,22.92 | 57.71,22.79 v57.69,22.77 | 57.71,22.79 57.84,22.92 | 58.1,23.15 57.87,22.92 | 57.87,22.92 57.84,22.92 | 57.84,22.92 57.71,22.79 | J4.58 58.1,23.15 | 58.1,23.15 57.87,22.92
  Bottom 0.1: J5.25 v57.69,22.77
N$74  (via drill 0.2)
  Top 0.1: J4.60 58.9,24.69 58.67,24.92 58.1,24.92 57.69,25.33 v57.69,25.59
  Bottom 0.1: J5.12 v57.69,25.59
N$75  (via drill 0.2)
  Top 0.1: J4.56 57.3,23.02 v57.05,22.77
  Bottom 0.1: J5.26 v57.05,22.77
N$76  (via drill 0.2)
  Top 0.1: J4.57 57.7,25 v57.1,25.6
  Bottom 0.1: v57.1,25.6 57.1,24.5 J5.11
N$77  (via drill 0.2)
  Top 0.1: J4.54 56.5,22.85 v56.42,22.77
  Bottom 0.1: J5.27 v56.41,22.77 v56.42,22.77
N$78  (via drill 0.2)
  Top 0.1: 56.9,23.15 J4.55 56.9,25.11 v56.42,25.59
  Bottom 0.1: J5.10 v56.41,25.59 v56.42,25.59
N$79  (via drill 0.2)
  Top 0.1: J4.53 56.1,23.09 v55.78,22.77
  Bottom 0.1: J5.28 v55.78,22.77
N$80  (via drill 0.2)
  Top 0.1: J4.52 55.7,25.5 v55.79,25.59
  Bottom 0.1: J5.9 v55.78,25.58 v55.79,25.59
N$81  (via drill 0.2)
  Top 0.1: J4.51 55.3,22.92 v55.15,22.77
  Bottom 0.1: J5.29 v55.15,22.77
N$82  (via drill 0.2)
  Top 0.1: 55.13,25.57 54.9,25.34 | 55.13,25.57 v55.15,25.59 | J4.50 54.9,25.34 | 54.9,25.34 55.13,25.57
  Bottom 0.1: J5.8 v55.15,25.58 v55.15,25.59
N$83  (via drill 0.2)
  Top 0.1: J4.49 v54.5,22.78 v54.51,22.77
  Bottom 0.1: J5.30 v54.51,22.77
N$84  (via drill 0.2)
  Top 0.1: J4.48 54.1,22.99 v53.88,22.77
  Bottom 0.1: J5.31 v53.88,22.77
N$85  (via drill 0.2)
  Top 0.1: v54.52,25.59 54.52,25.52 54.1,25.1 53.9,25.1 53.7,24.9 J4.47
  Bottom 0.1: J5.7 v54.51,25.58 v54.52,25.59
N$86  (via drill 0.2)
  Top 0.1: J4.46 53.3,22.82 v53.24,22.77
  Bottom 0.1: J5.32 v53.24,22.77
N$87  (via drill 0.2)
  Top 0.1: J4.45 52.9,23.06 v52.61,22.77
  Bottom 0.1: J5.33 v52.61,22.77
N$88  (via drill 0.2)
  Top 0.1: v53.85,25.6 53.17,24.92 52.6,24.92 52.5,24.82 J4.44
  Bottom 0.1: J5.6 53.88,25.57 v53.85,25.6
N$89  (via drill 0.2)
  Top 0.1: J4.43 52.1,22.89 v51.97,22.77
  Bottom 0.1: J5.34 v51.97,22.77
N$90  (via drill 0.2)
  Top 0.1: v51.34,22.77 51.37,22.77 51.7,23.1 J4.42
  Bottom 0.1: J5.35 v51.34,22.77
N$91  (via drill 0.2)
  Top 0.1: v53.2,25.6 53.2,25.5 52.85,25.15 52.3,25.15 52.18,25.03 51.5,25.03 51.3,24.83 J4.41
  Bottom 0.1: J5.5 53.24,25.56 v53.2,25.6
N$92  (via drill 0.2)
  Top 0.1: v51.97,25.89 51.72,25.64 51.72,25.63 51.49,25.41 50.8,25.41 50.5,25.11 J4.39
  Bottom 0.1: J5.3 v51.97,25.89
N$93  (via drill 0.2)
  Top 0.1: J4.5 61.3,20.2 60.78,19.68 60.29,19.68 59.3,19.68 59.3,19.65 v58.76,19.11
  Bottom 0.1: J6.23 58.95,19.31 v58.76,19.11
N$94  (via drill 0.2)
  Top 0.1: J4.4 61.7,20.1 61.09,19.49 60.37,19.49 v59.99,19.11
  Bottom 0.1: J6.22 59.59,19.51 v59.99,19.11
N$95  (via drill 0.2)
  Top 0.1: J4.3 62.1,20 61.21,19.11 v60.73,19.11
  Bottom 0.1: 60.23,20.07 J6.21 60.23,19.61 v60.73,19.11
N$96  (via drill 0.2)
  Top 0.1: J4.2 62.5,19.55 v62.16,19.21
  Bottom 0.1: v62.16,19.21 61.3,19.21 60.86,19.65 J6.20
N$97  (via drill 0.2)
  Top 0.1: 59.59,25.61 v59.59,25.59 60.07,25.11 60.88,25.11 61.3,24.69 J4.66
  Bottom 0.1: J5.15 v59.59,25.59
N$98  (via drill 0.2)
  Top 0.1: 60.86,25.64 v60.86,25.68 60.94,25.6 61.27,25.6 62.1,24.77 J4.68
  Bottom 0.1: v60.86,25.68 J5.17
N$99  (via drill 0.2)
  Top 0.1: v52.6,25.59 v52.6,25.6 52.22,25.6 51.84,25.22 51.1,25.22 50.9,25.02 J4.40
  Bottom 0.1: J5.4 v52.61,25.59 v52.6,25.59
N$100  (via drill 0.2)
  Top 0.1: v51.34,25.79 50.6,25.79 50.1,25.29 J4.38
  Bottom 0.1: v51.34,25.79 J5.2
N$101  (via drill 0.2)
  Top 0.1: J4.33 50.1,22.1 50.3,22.3 51.3,22.3
  Top 0.152: v51.34,22.23 51.34,22.26 51.3,22.3
  Bottom 0.1: J6.2 v51.34,22.23
N$102  (via drill 0.2)
  Top 0.1: J7.32 75,20.25 v75.84,19.41
  Bottom 0.1: v75.84,19.41 v75.83,19.41 J9.35
N$103  (via drill 0.2)
  Top 0.1: J7.31 75.4,20.31 75.92,19.79 75.99,19.79 76.04,19.74 76.14,19.74 v76.47,19.41
  Bottom 0.1: J9.34 v76.47,19.41
N$104  (via drill 0.2)
  Top 0.1: 75.8,20.72 J7.30 75.8,20.31 76.03,20.08 76.07,20.08 76.36,19.79 76.63,19.79 77.01,19.41 v77.11,19.41
  Bottom 0.1: J9.33 v77.1,19.41 v77.11,19.41
N$105  (via drill 0.2)
  Top 0.1: J7.29 76.2,21.9 76.47,22.17 v76.47,22.23
  Bottom 0.1: J9.3 v76.47,22.23
N$106  (via drill 0.2)
  Top 0.1: J7.28 76.6,20.31 76.83,20.08 77.07,20.08 v77.74,19.41
  Bottom 0.1: J9.32 v77.74,19.41
N$107  (via drill 0.2)
  Top 0.1: v77.11,22.23 77,22.12 J7.27
  Bottom 0.1: J9.4 v77.1,22.23 v77.11,22.23
N$108  (via drill 0.2)
  Top 0.1: J7.26 77.4,21.9 v77.73,22.23 v77.74,22.23
  Bottom 0.1: J9.5 v77.74,22.23
N$109  (via drill 0.2)
  Top 0.1: v78.38,19.41 77.8,19.99 J7.25
  Bottom 0.1: v78.38,19.41 78.35,19.44 78.38,19.46 J9.31
N$110  (via drill 0.2)
  Top 0.1: v78.38,22.23 78.2,22.05 J7.24
  Bottom 0.1: J9.6 v78.38,22.23
N$111  (via drill 0.2)
  Top 0.1: J7.23 78.6,21.9 78.93,22.23 v79.01,22.23
  Bottom 0.1: J9.7 v79.01,22.23
N$112  (via drill 0.2)
  Top 0.1: v79.01,19.41 79,19.42 J7.22
  Bottom 0.1: J9.30 79.01,19.7 | 79.01,19.7 79,19.69 | 79.01,19.7 v79.01,19.41
N$113  (via drill 0.2)
  Top 0.1: J7.21 79.4,21.9 79.65,22.15 v79.65,22.23
  Bottom 0.1: J9.8 v79.64,22.23 v79.65,22.23
N$114  (via drill 0.2)
  Top 0.1: v79.65,19.41 79.8,19.56 J7.20
  Bottom 0.1: J9.29 v79.64,19.41 v79.65,19.41
N$115  (via drill 0.2)
  Top 0.1: v80.28,22.23 80.2,22.15 J7.19
  Bottom 0.1: J9.9 v80.28,22.23
N$116  (via drill 0.2)
  Top 0.1: J7.18 80.6,19.8 80.28,19.48 v80.28,19.41
  Bottom 0.1: J9.28 v80.28,19.41
N$117  (via drill 0.2)
  Top 0.1: v80.92,22.23 81,22.15 J7.17
  Bottom 0.1: J9.10 v80.91,22.23 v80.92,22.23
N$118  (via drill 0.2)
  Top 0.1: v80.92,19.41 80.92,19.5 81.4,19.98 J7.16
  Bottom 0.1: J9.27 80.91,19.7 80.92,19.7 v80.92,19.41
N$119  (via drill 0.2)
  Top 0.1: J7.15 81.8,21.9 81.55,22.15 v81.55,22.23
  Bottom 0.1: J9.11 v81.55,22.23
N$120  (via drill 0.2)
  Top 0.1: v81.55,19.41 81.55,19.45 82.2,20.1 J7.14
  Bottom 0.1: J9.26 v81.55,19.41
N$121  (via drill 0.2)
  Top 0.1: J7.13 82.6,21.9 82.27,22.23 v82.19,22.23
  Bottom 0.1: J9.12 v82.18,22.23 v82.19,22.23
N$122  (via drill 0.2)
  Top 0.1: J7.12 83,21.9 82.82,22.08 v82.82,22.23
  Bottom 0.1: J9.13 v82.82,22.23
N$123  (via drill 0.2)
  Top 0.1: J7.11 83.4,20.31 83.17,20.08 82.86,20.08 v82.19,19.41
  Bottom 0.1: J9.25 v82.18,19.41 v82.19,19.41
N$124  (via drill 0.2)
  Top 0.1: J7.10 83.8,21.9 v83.47,22.23 v83.46,22.23
  Bottom 0.1: J9.14 v83.45,22.23 v83.46,22.23
N$125  (via drill 0.2)
  Top 0.1: J7.9 84.2,22 84.1,22.1 v84.1,22.23 v84.09,22.23
  Bottom 0.1: J9.15 v84.09,22.23
N$126  (via drill 0.2)
  Top 0.1: J7.8 84.6,20 83.6,20 83.5,19.9 83.31,19.9 v83.02,19.61
  Bottom 0.1: J9.24 82.82,19.81 v83.02,19.61
N$127  (via drill 0.2)
  Top 0.1: J7.7 85,21.9 84.73,22.17 v84.73,22.23
  Bottom 0.1: J9.16 v84.72,22.23 v84.73,22.23
N$128  (via drill 0.2)
  Top 0.1: J7.6 85.4,22.04 85.38,22.06 v85.38,22.14
  Bottom 0.1: v85.38,22.14 85.38,21.87 J9.17
N$129  (via drill 0.2)
  Top 0.1: J7.69 87,22.95 86.88,22.84 85.62,22.84 v85.47,22.68
  Bottom 0.1: J8.20 85.47,23.07 v85.47,22.68
N$130  (via drill 0.2)
  Top 0.1: 84.73,25.57 v84.73,25.59 84.92,25.59 85.21,25.3 85.71,25.3 86.18,24.83 86.18,23.94 J7.67
  Bottom 0.1: J8.16 v84.72,25.59 v84.73,25.59
N$131  (via drill 0.2)
  Top 0.1: v84.82,22.77 84.97,22.92 85.17,22.92 85.28,23.03 85.28,23.09 85.4,23.21 J7.65
  Bottom 0.1: J8.21 84.72,22.77 84.73,22.77 v84.82,22.77
N$132  (via drill 0.2)
  Top 0.1: v83.46,25.59 83.46,25.54 83.8,25.2 84.09,25.2 84.37,24.92 84.81,24.92 85,24.73 J7.64
  Bottom 0.1: J8.14 v83.45,25.59 v83.46,25.59
N$133  (via drill 0.2)
  Top 0.1: J7.63 84.6,23.09 84.26,22.76 v84.17,22.76
  Bottom 0.1: J8.22 84.09,22.74 84.11,22.76 v84.17,22.76
N$134  (via drill 0.2)
  Top 0.1: 83.72,23.03 v83.46,22.77 | 83.72,23.03 83.8,23.11 | J7.61 83.8,23.11 | 83.8,23.11 83.72,23.03
  Bottom 0.1: v83.46,22.77 J8.23
N$135  (via drill 0.2)
  Top 0.1: 82.82,25.48 v82.82,25.59 83.49,24.92 83.97,24.92 84.2,24.69 J7.62
  Bottom 0.1: J8.13 v82.82,25.59
N$136  (via drill 0.2)
  Top 0.1: v82.82,22.77 83,22.95 J7.59
  Bottom 0.1: J8.24 v82.82,22.77
N$137  (via drill 0.2)
  Top 0.1: 82.34,22.92 82.37,22.92 | 82.21,22.79 v82.19,22.77 | 82.21,22.79 82.34,22.92 | 82.6,23.15 82.37,22.92 | 82.37,22.92 82.34,22.92 | 82.34,22.92 82.21,22.79 | J7.58 82.6,23.15 | 82.6,23.15 82.37,22.92
  Bottom 0.1: J8.25 v82.18,22.77 v82.19,22.77
N$138  (via drill 0.2)
  Top 0.1: J7.60 83.4,24.69 83.17,24.92 82.6,24.92 82.19,25.33 v82.19,25.59
  Bottom 0.1: J8.12 v82.18,25.59 v82.19,25.59
N$139  (via drill 0.2)
  Top 0.1: J7.56 81.8,23.02 v81.55,22.77
  Bottom 0.1: J8.26 v81.55,22.77
N$140  (via drill 0.2)
  Top 0.1: J7.57 82.2,25 v81.6,25.6
  Bottom 0.1: v81.6,25.6 81.6,24.5 J8.11
N$141  (via drill 0.2)
  Top 0.1: J7.54 81,22.85 v80.92,22.77
  Bottom 0.1: J8.27 v80.91,22.77 v80.92,22.77
N$142  (via drill 0.2)
  Top 0.1: 81.4,23.15 J7.55 81.4,25.11 v80.92,25.59
  Bottom 0.1: J8.10 v80.91,25.59 v80.92,25.59
N$143  (via drill 0.2)
  Top 0.1: J7.53 80.6,23.09 v80.28,22.77
  Bottom 0.1: J8.28 v80.28,22.77
N$144  (via drill 0.2)
  Top 0.1: J7.52 80.2,25.5 v80.29,25.59
  Bottom 0.1: J8.9 v80.28,25.58 v80.29,25.59
N$145  (via drill 0.2)
  Top 0.1: J7.51 79.8,22.92 v79.65,22.77
  Bottom 0.1: J8.29 v79.64,22.77 v79.65,22.77
N$146  (via drill 0.2)
  Top 0.1: 79.63,25.57 79.4,25.34 | 79.63,25.57 v79.65,25.59 | J7.50 79.4,25.34 | 79.4,25.34 79.63,25.57
  Bottom 0.1: J8.8 v79.64,25.58 v79.65,25.59
N$147  (via drill 0.2)
  Top 0.1: J7.49 v79,22.78 v79.01,22.77
  Bottom 0.1: J8.30 v79.01,22.77
N$148  (via drill 0.2)
  Top 0.1: J7.48 78.6,22.99 v78.38,22.77
  Bottom 0.1: J8.31 v78.38,22.77
N$149  (via drill 0.2)
  Top 0.1: v79.02,25.59 79.02,25.52 78.6,25.1 78.4,25.1 78.2,24.9 J7.47
  Bottom 0.1: J8.7 v79.01,25.58 v79.02,25.59
N$150  (via drill 0.2)
  Top 0.1: J7.46 77.8,22.82 v77.74,22.77
  Bottom 0.1: J8.32 v77.74,22.77
N$151  (via drill 0.2)
  Top 0.1: J7.45 77.4,23.06 v77.11,22.77
  Bottom 0.1: J8.33 v77.1,22.77 v77.11,22.77
N$152  (via drill 0.2)
  Top 0.1: v78.35,25.6 77.67,24.92 77.1,24.92 77,24.82 J7.44
  Bottom 0.1: J8.6 78.38,25.57 v78.35,25.6
N$153  (via drill 0.2)
  Top 0.1: J7.43 76.6,22.89 v76.47,22.77
  Bottom 0.1: J8.34 v76.47,22.77
N$154  (via drill 0.2)
  Top 0.1: v75.84,22.77 75.87,22.77 76.2,23.1 J7.42
  Bottom 0.1: J8.35 v75.83,22.77 v75.84,22.77
N$155  (via drill 0.2)
  Top 0.1: v77.7,25.6 77.7,25.5 77.35,25.15 76.8,25.15 76.68,25.03 76,25.03 75.8,24.83 J7.41
  Bottom 0.1: J8.5 77.74,25.56 v77.7,25.6
N$156  (via drill 0.2)
  Top 0.1: v76.47,25.89 76.22,25.64 76.22,25.63 75.99,25.41 75.3,25.41 75,25.11 J7.39
  Bottom 0.1: J8.3 v76.47,25.89
N$157  (via drill 0.2)
  Top 0.1: J7.5 85.8,20.2 85.28,19.68 84.79,19.68 83.8,19.68 83.8,19.65 v83.26,19.11
  Bottom 0.1: J9.23 83.45,19.31 v83.26,19.11
N$158  (via drill 0.2)
  Top 0.1: J7.4 86.2,20.1 85.59,19.49 84.87,19.49 v84.49,19.11
  Bottom 0.1: J9.22 84.09,19.51 v84.49,19.11
N$159  (via drill 0.2)
  Top 0.1: J7.3 86.6,20 85.71,19.11 v85.23,19.11
  Bottom 0.1: 84.72,20.07 J9.21 84.72,19.61 v85.23,19.11
N$160  (via drill 0.2)
  Top 0.1: J7.2 87,19.55 v86.66,19.21
  Bottom 0.1: v86.66,19.21 85.8,19.21 85.36,19.65 J9.20
N$161  (via drill 0.2)
  Top 0.1: 84.09,25.61 v84.09,25.59 84.57,25.11 85.38,25.11 85.8,24.69 J7.66
  Bottom 0.1: J8.15 v84.09,25.59
N$162  (via drill 0.2)
  Top 0.1: 85.36,25.64 v85.36,25.68 85.44,25.6 85.77,25.6 86.6,24.77 J7.68
  Bottom 0.1: v85.36,25.68 J8.17
N$163  (via drill 0.2)
  Top 0.1: v77.1,25.59 v77.1,25.6 76.71,25.6 76.34,25.22 75.6,25.22 75.4,25.02 J7.40
  Bottom 0.1: J8.4 v77.1,25.59
N$164  (via drill 0.2)
  Top 0.1: v75.84,25.79 75.1,25.79 74.6,25.29 J7.38
  Bottom 0.1: v75.84,25.79 J8.2
N$165  (via drill 0.2)
  Top 0.1: J7.33 74.6,22.1 74.8,22.3 75.8,22.3
  Top 0.152: v75.84,22.23 75.84,22.26 75.8,22.3
  Bottom 0.1: J9.2 v75.83,22.23 v75.84,22.23
N$166  (via drill 0.2)
  Top 0.1: J10.32 25,40.25 v25.84,39.41
  Bottom 0.1: v25.84,39.41 J12.35
N$167  (via drill 0.2)
  Top 0.1: J10.31 25.4,40.31 25.92,39.79 25.99,39.79 26.04,39.74 26.14,39.74 v26.47,39.41
  Bottom 0.1: J12.34 v26.47,39.41
N$168  (via drill 0.2)
  Top 0.1: 25.8,40.72 J10.30 25.8,40.31 26.03,40.08 26.07,40.08 26.36,39.79 26.63,39.79 27.01,39.41 v27.11,39.41
  Bottom 0.1: J12.33 v27.1,39.41 v27.11,39.41
N$169  (via drill 0.2)
  Top 0.1: J10.29 26.2,41.9 26.47,42.17 v26.47,42.23
  Bottom 0.1: J12.3 v26.47,42.23
N$170  (via drill 0.2)
  Top 0.1: J10.28 26.6,40.31 26.83,40.08 27.07,40.08 v27.74,39.41
  Bottom 0.1: J12.32 v27.74,39.41
N$171  (via drill 0.2)
  Top 0.1: v27.11,42.23 27,42.12 J10.27
  Bottom 0.1: J12.4 v27.1,42.23 v27.11,42.23
N$172  (via drill 0.2)
  Top 0.1: J10.26 27.4,41.9 v27.73,42.23 v27.74,42.23
  Bottom 0.1: J12.5 v27.74,42.23
N$173  (via drill 0.2)
  Top 0.1: v28.38,39.41 27.8,39.99 J10.25
  Bottom 0.1: v28.38,39.41 28.35,39.44 28.38,39.46 J12.31
N$174  (via drill 0.2)
  Top 0.1: v28.38,42.23 28.2,42.05 J10.24
  Bottom 0.1: J12.6 v28.38,42.23
N$175  (via drill 0.2)
  Top 0.1: J10.23 28.6,41.9 28.93,42.23 v29.01,42.23
  Bottom 0.1: J12.7 v29.01,42.23
N$176  (via drill 0.2)
  Top 0.1: v29.01,39.41 29,39.42 J10.22
  Bottom 0.1: J12.30 29.01,39.7 | 29.01,39.7 29,39.69 | 29.01,39.7 v29.01,39.41
N$177  (via drill 0.2)
  Top 0.1: J10.21 29.4,41.9 29.65,42.15 v29.65,42.23
  Bottom 0.1: J12.8 v29.65,42.23
N$178  (via drill 0.2)
  Top 0.1: v29.65,39.41 29.8,39.56 J10.20
  Bottom 0.1: J12.29 v29.65,39.41
N$179  (via drill 0.2)
  Top 0.1: v30.28,42.23 30.2,42.15 J10.19
  Bottom 0.1: J12.9 v30.28,42.23
N$180  (via drill 0.2)
  Top 0.1: J10.18 30.6,39.8 30.28,39.48 v30.28,39.41
  Bottom 0.1: J12.28 v30.28,39.41
N$181  (via drill 0.2)
  Top 0.1: v30.92,42.23 31,42.15 J10.17
  Bottom 0.1: J12.10 v30.91,42.23 v30.92,42.23
N$182  (via drill 0.2)
  Top 0.1: v30.92,39.41 30.92,39.5 31.4,39.98 J10.16
  Bottom 0.1: J12.27 30.91,39.7 30.92,39.7 v30.92,39.41
N$183  (via drill 0.2)
  Top 0.1: J10.15 31.8,41.9 31.55,42.15 v31.55,42.23
  Bottom 0.1: J12.11 v31.55,42.23
N$184  (via drill 0.2)
  Top 0.1: v31.55,39.41 31.55,39.45 32.2,40.1 J10.14
  Bottom 0.1: J12.26 v31.55,39.41
N$185  (via drill 0.2)
  Top 0.1: J10.13 32.6,41.9 32.27,42.23 v32.19,42.23
  Bottom 0.1: J12.12 v32.19,42.23
N$186  (via drill 0.2)
  Top 0.1: J10.12 33,41.9 32.82,42.08 v32.82,42.23
  Bottom 0.1: J12.13 v32.82,42.23
N$187  (via drill 0.2)
  Top 0.1: J10.11 33.4,40.31 33.17,40.08 32.86,40.08 v32.19,39.41
  Bottom 0.1: J12.25 v32.19,39.41
N$188  (via drill 0.2)
  Top 0.1: J10.10 33.8,41.9 v33.47,42.23 v33.46,42.23
  Bottom 0.1: J12.14 v33.45,42.23 v33.46,42.23
N$189  (via drill 0.2)
  Top 0.1: J10.9 34.2,42 34.1,42.1 v34.1,42.23 v34.09,42.23
  Bottom 0.1: J12.15 v34.09,42.23
N$190  (via drill 0.2)
  Top 0.1: J10.8 34.6,40 33.6,40 33.5,39.9 33.31,39.9 v33.02,39.61
  Bottom 0.1: J12.24 32.82,39.81 v33.02,39.61
N$191  (via drill 0.2)
  Top 0.1: J10.7 35,41.9 34.73,42.17 v34.73,42.23
  Bottom 0.1: J12.16 v34.73,42.23
N$192  (via drill 0.2)
  Top 0.1: J10.6 35.4,42.04 35.38,42.06 v35.38,42.14
  Bottom 0.1: v35.38,42.14 35.38,41.87 J12.17
N$193  (via drill 0.2)
  Top 0.1: J10.69 37,42.95 36.88,42.84 35.62,42.84 v35.47,42.69
  Bottom 0.1: J11.20 35.47,43.07 v35.47,42.69
N$194  (via drill 0.2)
  Top 0.1: 34.73,45.57 v34.73,45.59 34.92,45.59 35.21,45.3 35.71,45.3 36.18,44.83 36.18,43.94 J10.67
  Bottom 0.1: J11.16 v34.73,45.59